# Altium PCB Medusa-AI-battery.PcbDoc
Units mil, origin at the board's own origin, x right, y up, seen from the top; angles counter-clockwise.
Board outline 7750 x 7750 mil, 2 copper layers (Top Layer, Bottom Layer); 9 components, 2 nets, 22 pads, 0 vias.
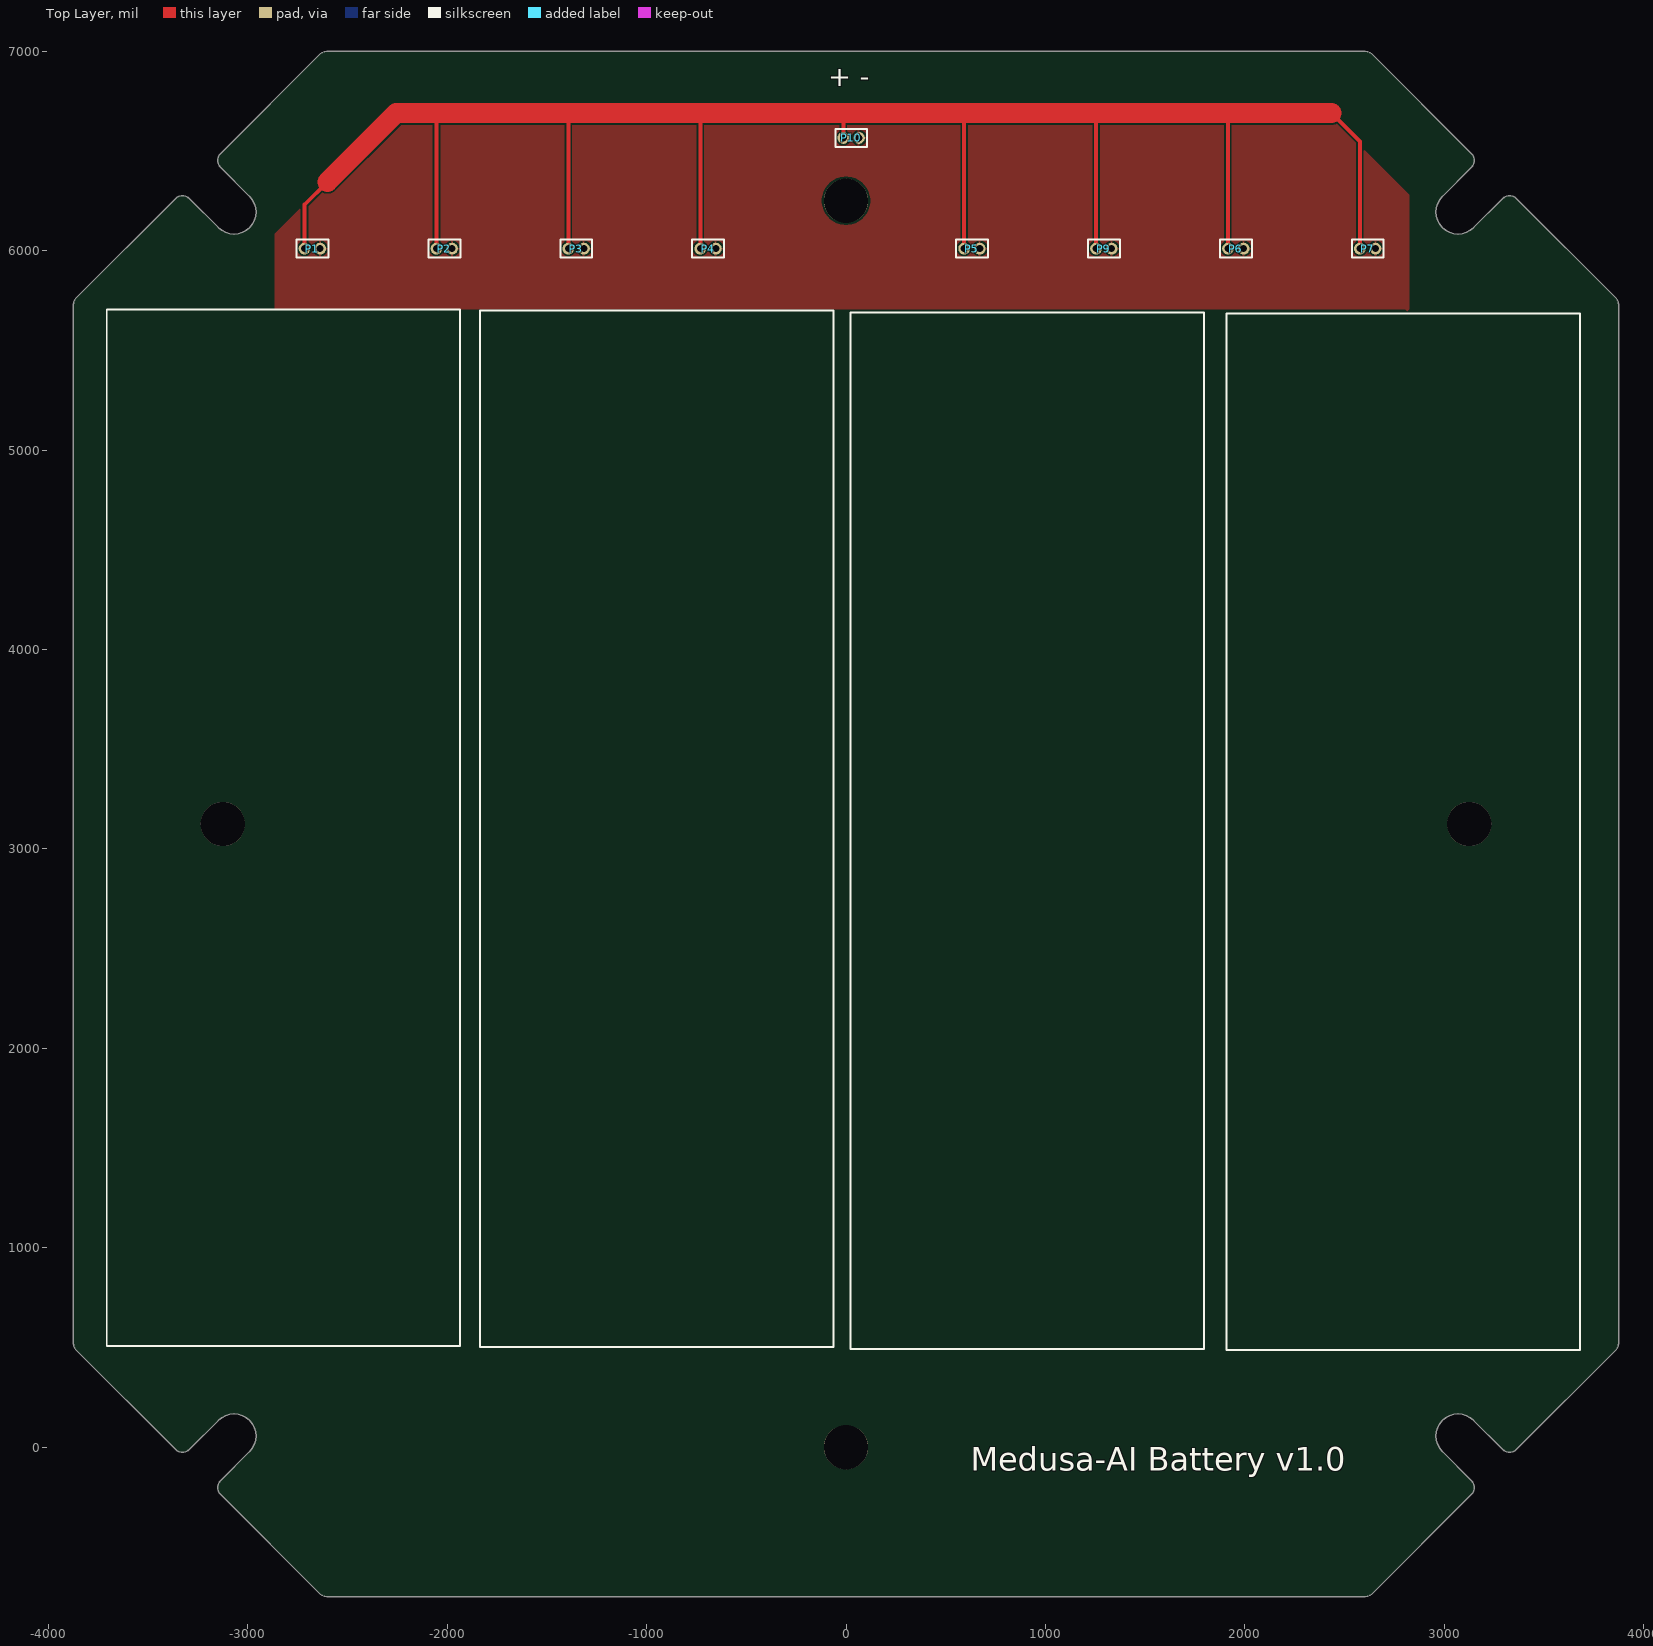
[diagram p0: Top Layer view]
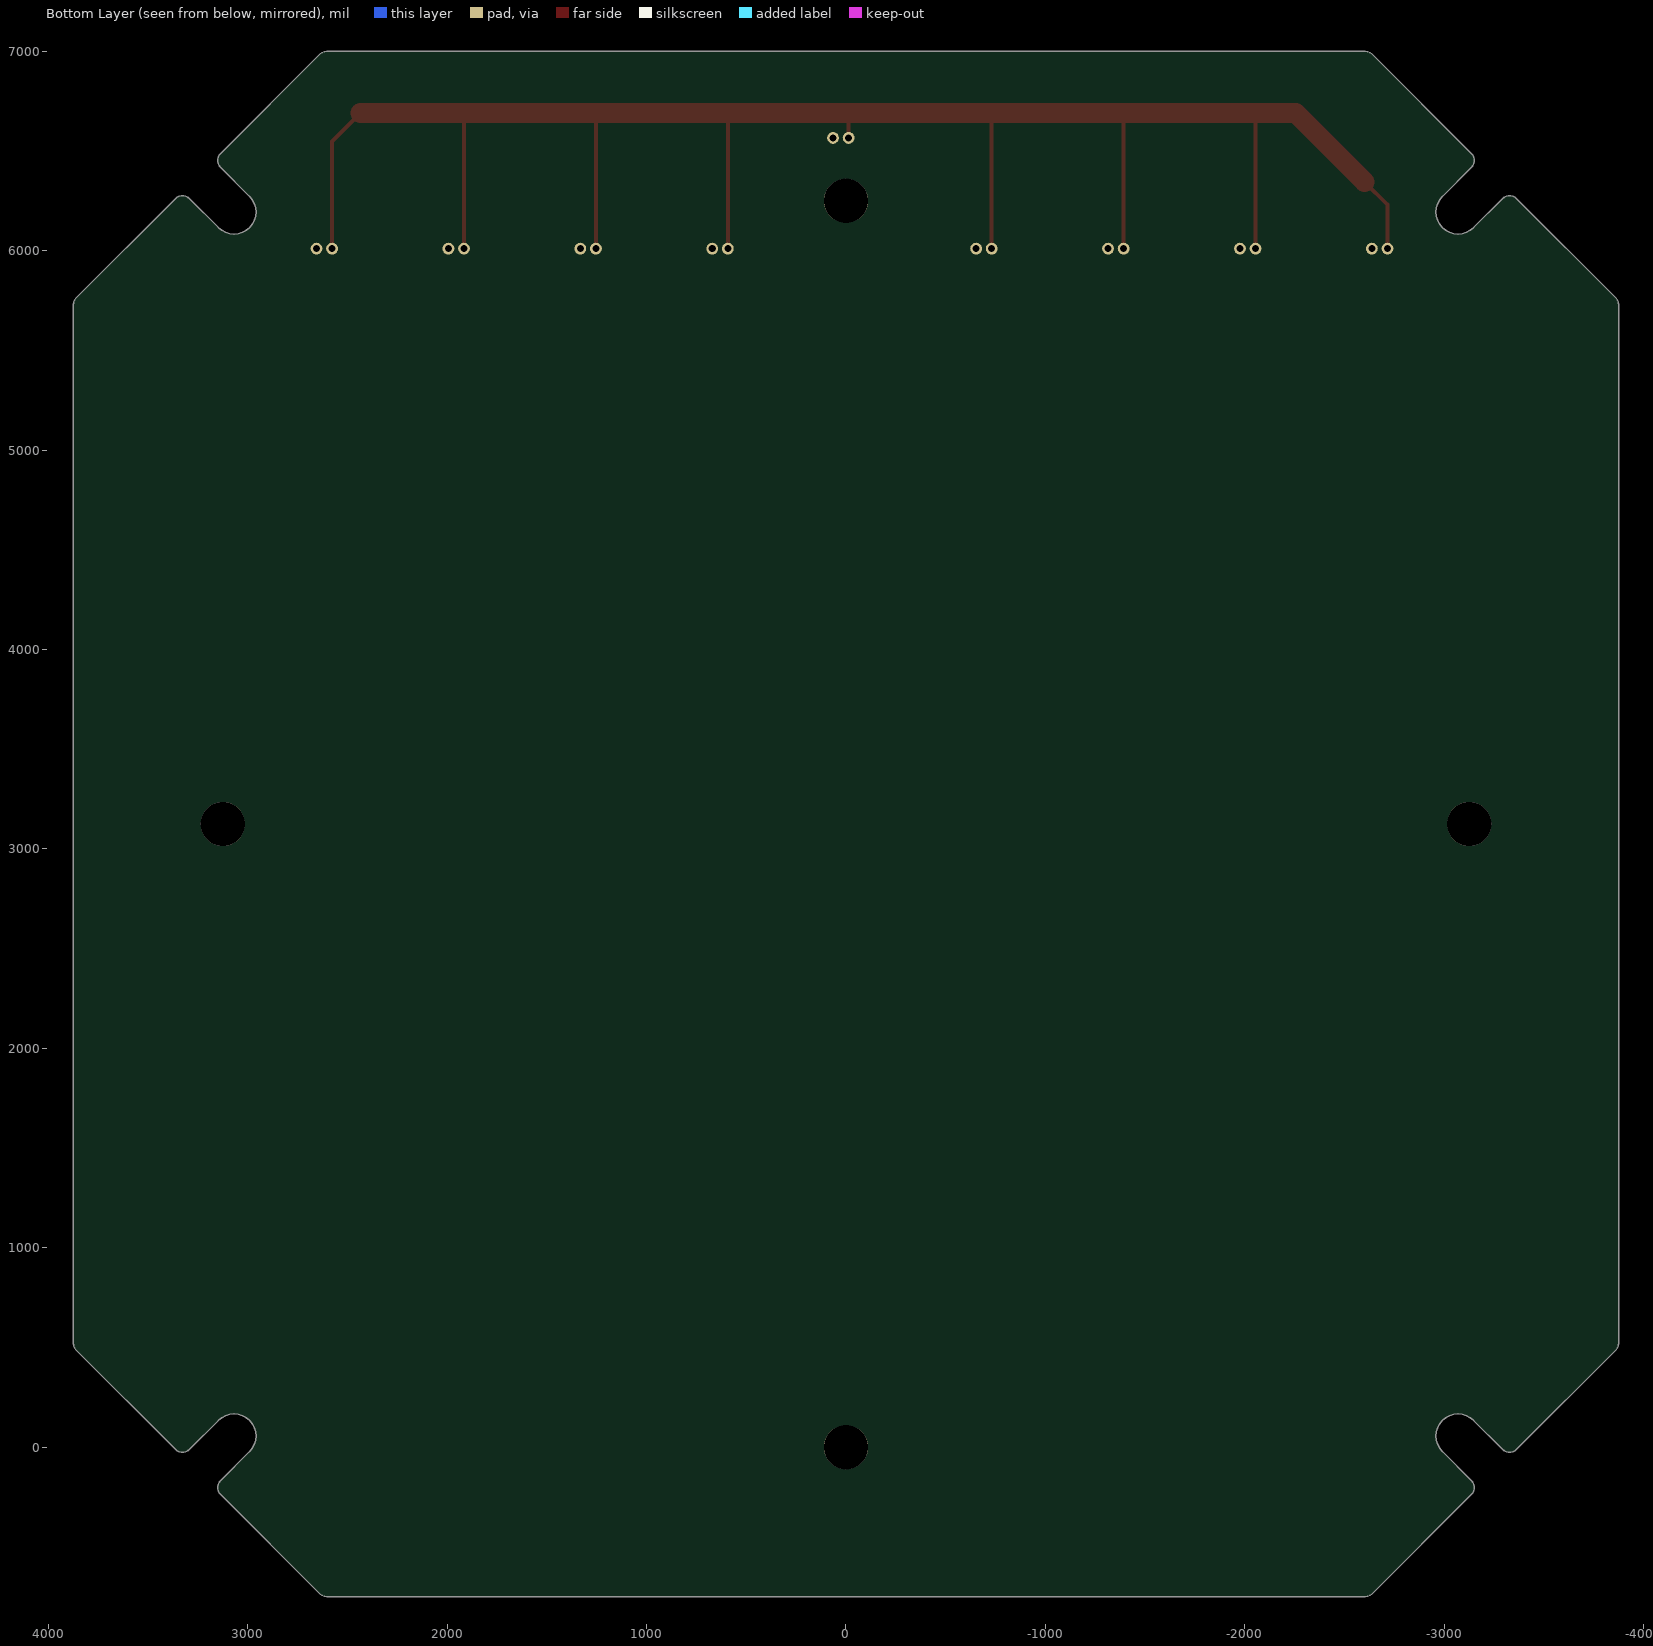
[diagram p1: Bottom Layer view, seen from below]

## Layer stack, top to bottom
Top Solder: solder mask 0.4, Solder Resist, Dk 3.5
Top Layer: signal copper 1.4
Dielectric 1: dielectric 12.6, FR-4, Dk 4.8
Bottom Layer: signal copper 1.4
Bottom Solder: solder mask 0.4, Solder Resist, Dk 3.5

## Board outline
3860.36,5762.52 3362.43,6260.45 3353.67,6267.43 3343.59,6272.29 3332.67,6274.78 3321.47,6274.78 3310.56,6272.29 3300.47,6267.43 3291.72,6260.45 3146.57,6115.3 3129.82,6101.55 3110.72,6091.34 3089.99,6085.06 3068.43,6082.93 3046.87,6085.06 3026.14,6091.34 3007.04,6101.55 2990.3,6115.3 2976.55,6132.04 2966.34,6151.14 2960.05,6171.87 2957.93,6193.43 2960.05,6214.99 2966.34,6235.72 2976.55,6254.82 2990.3,6271.57 3135.45,6416.72 3142.43,6425.47 3147.29,6435.56 3149.78,6446.47 3149.78,6457.67 3147.29,6468.59 3142.43,6478.67 3135.45,6487.43 2637.52,6985.36 2627.16,6993.3 2615.1,6998.3 2602.16,7000 -2602.16,7000 -2615.11,6998.3 -2627.16,6993.3 -2637.52,6985.36 -3135.45,6487.43 -3142.43,6478.67 -3147.29,6468.59 -3149.78,6457.67 -3149.78,6446.47 -3147.29,6435.56 -3142.43,6425.47 -3135.45,6416.72 -2990.3,6271.57 -2976.55,6254.82 -2966.34,6235.72 -2960.05,6214.99 -2957.93,6193.43 -2960.05,6171.87 -2966.34,6151.14 -2976.55,6132.04 -2990.3,6115.3 -3007.04,6101.55 -3026.14,6091.34 -3046.87,6085.05 -3068.43,6082.93 -3089.99,6085.05 -3110.72,6091.34 -3129.82,6101.55 -3146.57,6115.3 -3291.72,6260.45 -3300.47,6267.43 -3310.56,6272.29 -3321.47,6274.78 -3332.67,6274.78 -3343.59,6272.29 -3353.67,6267.43 -3362.43,6260.45 -3860.36,5762.52 -3868.3,5752.16 -3873.3,5740.1 -3875,5727.16 -3875,522.84 -3873.3,509.89 -3868.3,497.84 -3860.36,487.48 -3362.43,-10.45 -3353.67,-17.43 -3343.59,-22.29 -3332.67,-24.78 -3321.47,-24.78 -3310.56,-22.29 -3300.47,-17.43 -3291.72,-10.45 -3146.57,134.7 -3129.82,148.45 -3110.72,158.66 -3089.99,164.95 -3068.43,167.07 -3046.87,164.95 -3026.14,158.66 -3007.04,148.45 -2990.3,134.7 -2976.55,117.96 -2966.34,98.86 -2960.05,78.13 -2957.93,56.57 -2960.05,35.01 -2966.34,14.28 -2976.55,-4.82 -2990.3,-21.57 -3135.45,-166.72 -3142.43,-175.47 -3147.29,-185.56 -3149.78,-196.47 -3149.78,-207.67 -3147.29,-218.59 -3142.43,-228.67 -3135.45,-237.43 -2637.52,-735.36 -2627.16,-743.3 -2615.1,-748.3 -2602.16,-750 2602.16,-750 2615.1,-748.3 2627.16,-743.3 2637.52,-735.36 3135.45,-237.43 3142.43,-228.67 3147.29,-218.59 3149.78,-207.67 3149.78,-196.47 3147.29,-185.56 3142.43,-175.47 3135.45,-166.72 2990.3,-21.57 2976.55,-4.82 2966.34,14.28 2960.06,35.01 2957.93,56.57 2960.06,78.13 2966.34,98.86 2976.55,117.96 2990.3,134.7 3007.04,148.45 3026.14,158.66 3046.87,164.95 3068.43,167.07 3089.99,164.95 3110.72,158.66 3129.82,148.45 3146.57,134.7 3291.72,-10.45 3300.47,-17.43 3310.56,-22.29 3321.47,-24.78 3332.67,-24.78 3343.59,-22.29 3353.67,-17.43 3362.43,-10.45 3860.36,487.48 3868.3,497.84 3873.3,509.9 3875,522.84 3875,5727.16 3873.3,5740.11 3868.3,5752.16

## Design rules (kind name [scope] priority, off if disabled: settings)
Clearance [All] p1: gap=10 ignorepadtopadclearanceinfootprint=FALSE except(0: Arc-Hole Track-Hole SMDPad-Hole THPad-Hole Via-Hole Fill-Hole Poly-Hole Region-Hole Text-Hole)
PolygonConnect [All] p1: connectstyle=Relief reliefconductorwidth=10 reliefentries=4 polygonreliefangle="90 Angle" airgapwidth=10
RoutingVias [All] p1: holewidth=28 width=50 viastyle="Through Hole" minholewidth=28 minwidth=50 maxholewidth=28 maxwidth=50
SolderMaskExpansion [All] p1: expansion=4 istentingtop=FALSE
Width [All] p1: maxlimit=100 minlimit=10 preferedwidth=20
30 further rules are at their usual default settings.

## Components (designator, comment, footprint, x,y, rotation, side; value= is the part's Value field where it differs from the comment)
P1 "BAT" HDR_2x1_2mm -2715.63,6010 r270 top
P2 "BAT" HDR_2x1_2mm -2054.14,6010 r270 top
P3 "BAT" HDR_2x1_2mm -1392.66,6010 r270 top
P4 "BAT" HDR_2x1_2mm -731.17,6010 r270 top
P5 "BAT" HDR_2x1_2mm 591.8,6010 r270 top
P6 "BAT" HDR_2x1_2mm 1914.77,6010 r270 top
P7 "BAT" HDR_2x1_2mm 2576.26,6010 r270 top
P9 "BAT" HDR_2x1_2mm 1253.29,6010 r270 top
P10 "Interface" HDR_2x1_2mm -13.74,6565 r270 top

## Footprints (in the part's own frame and the unit in brackets; to place one, negate y for a bottom-side part, rotate by r counter-clockwise, add the part's x,y. Pads: shape width x height; smd on the part's side, far side on the other; paste and mask are expansions set on the pad)
HDR_2x1_2mm [mm]
  round 1.5 hole 0.9: 1(0,0.016) 2(0,2)
  silkscreen extent -1.14,-1.02 1.14,3.05

## Part data
P1 P2 P3 P4 P5 P6 P7 P9 P10: library part HDR_2x1_2mm

## Free pads (board coordinates)
  round 221 hole 221: 1(-3125,3125) 1(0,0) 1(0,6250) 1(3125,3125)

## Nets (pads, with @x,y where several pads share a name; then routed paths per layer and width w, separated by ;. In a path a pad name is that pad's centre, name@x,y a point inside that pad or via, vN(x,y) a via of type N, cw(c..) or ccw(c..) an arc to the next point about the centre after c; other vN are vias at no path point)
4V2: P1.1 P2.1 P3.1 P4.1 P5.1 P6.1 P7.1 P9.1 P10.1 | length 10559.3
  Top Layer w20: P1.1 -2715,6230 -2600,6345 ; P2.1 -2053.51,6686.49 -2050,6690 ; P3.1 -1392.03,6690 -1392.03,6710 ; P4.1 -730.54,6689.46 -730,6690 ; P10.1 -13.11,6681.89 -5,6690 ; P5.1 592.43,6682.43 600,6690 ; P9.1 1253.92,6678.92 1265,6690 ; P6.1 1915.4,6000.4 1915,6000 1915,6685 1920,6690 ; 2435,6690 2576.89,6548.11 P7.1
  Top Layer w100: -2600,6345 -2255,6690 -2050,6690 -1392.03,6690 -730,6690 -5,6690 600,6690 1265,6690 1920,6690 2435,6690
GND: P1.2 P2.2 P3.2 P4.2 P5.2 P6.2 P7.2 P9.2 P10.2

## Polygon pours and split planes (outlines as drawn)
GND on Top Layer "GND_L01_P000" (solid, pour order 0): -1855,6645 -1860,6640 -2310,6640 -2865,6085 -2865,5705 2805,5705 2815,5695 2825,5705 2825,6280 2460,6645

## Silkscreen, mask and mechanical layers (free items; w line width, h text height)
Top Overlay:
  lines w10: -3706.65,508.15 -1935,508.15 -1935,5705 -3706.65,5705 -3706.65,508.15 ; -1835,503.15 -63.35,503.15 -63.35,5700 -1835,5700 -1835,503.15 ; 23.35,493.15 1795,493.15 1795,5690 23.35,5690 23.35,493.15 ; 1908.35,488.15 3680,488.15 3680,5685 1908.35,5685 1908.35,488.15
  text "+ -" at -90,6825 h100
  text "Medusa-AI Battery v1.0" at 625,-157.42 h200
Mechanical 1:
  drawing of 164 lines, arcs and shapes, not listed